# Altium PCB Плата-2.PcbDoc
Units mm, origin at the board's own origin, x right, y up, seen from the top; angles counter-clockwise.
Board outline 152.4 x 101.6 mm, 2 copper layers (Top Layer, Bottom Layer); 13 components, 14 nets, 124 pads, 0 vias.
Unrouted connection lines stored in the file: 2.
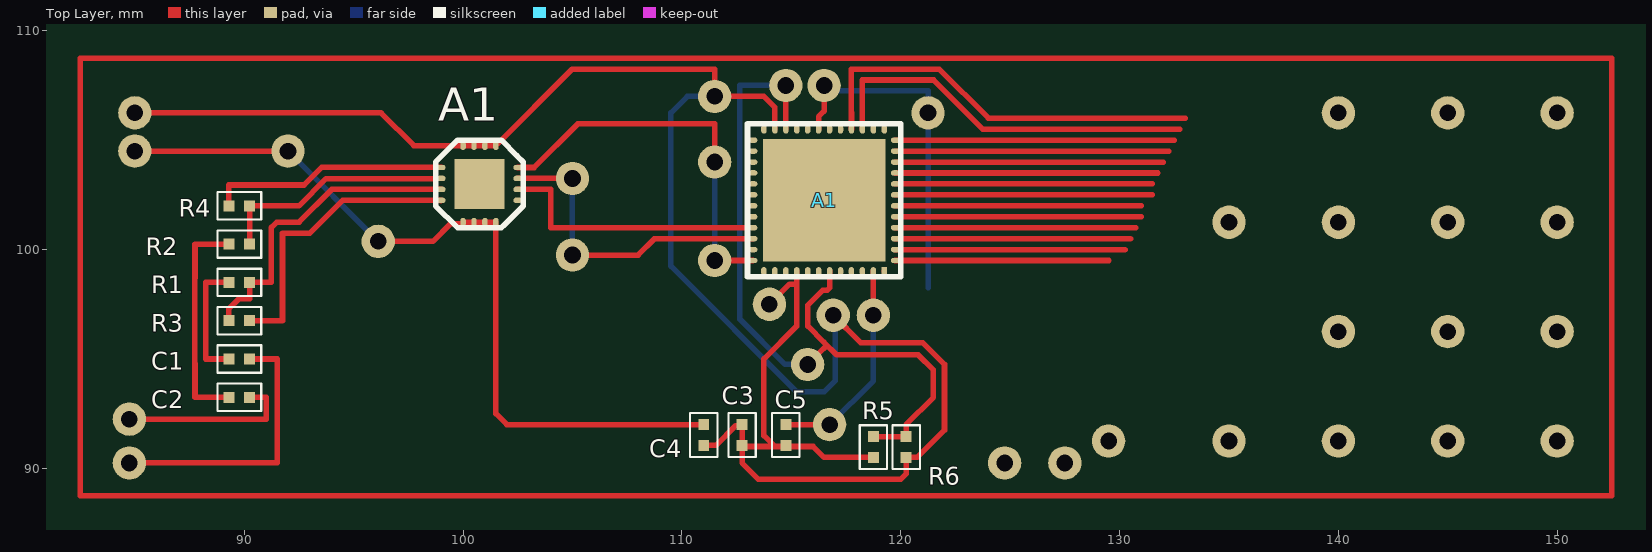
[diagram p0: Top Layer view]
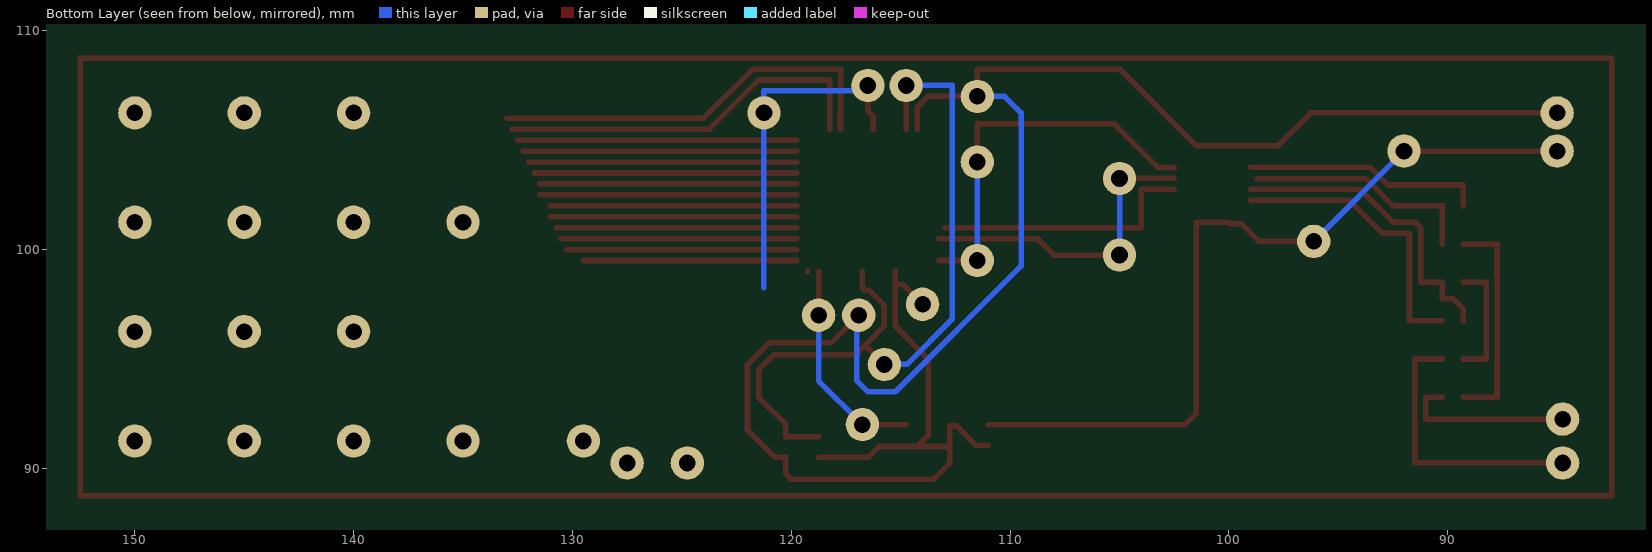
[diagram p1: Bottom Layer view, seen from below]

## Layer stack, top to bottom
Top Solder: solder mask 0.0102, Solder Resist, Dk 3.5
Top Layer: signal copper 0.0356
Dielectric 1: dielectric 0.32, FR-4, Dk 4.8
Bottom Layer: signal copper 0.0356
Bottom Solder: solder mask 0.0102, Solder Resist, Dk 3.5

## Board outline
25.4,25.4 177.8,25.4 177.8,127 25.4,127

## Design rules (kind name [scope] priority, off if disabled: settings)
Clearance [All] p1: gap=0.254 ignorepadtopadclearanceinfootprint=FALSE except(0: Arc-Hole Track-Hole SMDPad-Hole THPad-Hole Via-Hole Fill-Hole Poly-Hole Region-Hole Text-Hole)
PolygonConnect [All] p1: connectstyle=Relief reliefconductorwidth=0.254 reliefentries=4 polygonreliefangle="90 Angle" airgapwidth=0.254
RoomDefinition Схемотехника-2 [InComponentClass('Схемотехника-2')] p1: confinementstyle=ConfineIn formatcopy=TRUE lockcomponents=FALSE outline 68.234,43.623 127.924,43.623 127.924,53.275 68.234,53.275
RoutingVias [All] p1: holewidth=0.711 width=1.27 viastyle="Through Hole" minholewidth=0.711 minwidth=1.27 maxholewidth=0.711 maxwidth=1.27
ShortCircuit [All] p1: allowed=TRUE
SolderMaskExpansion [All] p1: expansion=0.102
Width [All] p1: maxlimit=0.254 minlimit=0.254 preferedwidth=0.254
29 further rules are at their usual default settings.

## Components (designator, comment, footprint, x,y, rotation, side; value= is the part's Value field where it differs from the comment)
A1 "ACP 14-byt" ads61b49 116.5,102.25 r180 top (schematic designator *)
A1 "ADA4932-1" ADA4932-2 100.75,103 r180 top
C1 "Cond" Capacitor 89.3,95 r0 top
C2 "Cond" Capacitor 89.3,93.25 r0 top
C3 "Cond" Capacitor 112.75,91.05 r90 top
C4 "Cond" Capacitor 111,92 r270 top
C5 "Cond" Capacitor 114.75,92 r270 top
R1 "Res" Resistor 88.7,97.8 r0 top
R2 "Res" Resistor 88.7,99.55 r0 top
R3 "Res" Resistor 88.7,96.05 r0 top
R4 "Res" Resistor 90.85,102.7 r180 top
R5 "Res" Resistor 119.45,89.9 r90 top
R6 "Res" Resistor 119.55,92.05 r270 top

## Footprints (in the part's own frame and the unit in brackets; to place one, negate y for a bottom-side part, rotate by r counter-clockwise, add the part's x,y. Pads: shape width x height; smd on the part's side, far side on the other; paste and mask are expansions set on the pad)
ADA4932-2 [mm]
  oval 0.4x0.25 smd: 1(1.75,0.75) 3(1.75,-0.25) 4(1.75,-0.75) 9(-1.75,-0.75) 10(-1.75,-0.25) 11(-1.75,0.25) 12(-1.75,0.75) 89(1.75,0.25)
  oval 0.25x0.4 smd: 5(0.75,-1.75) 6(0.25,-1.75) 7(-0.25,-1.75) 8(-0.75,-1.75) 13(-0.75,1.75) 14(-0.25,1.75) 15(0.25,1.75) 16(0.75,1.75)
  rect 2.3x2.3 smd: 25(0,0)
  silkscreen extent -2,-2 2,2.01
ads61b49 [mm]
  rect 0.25x0.4 smd: 1(-2.75,3.25)
  oval 0.25x0.4 smd: 2(-2.25,3.25) 3(-1.75,3.25) 4(-1.25,3.25) 5(-0.75,3.25) 6(-0.25,3.25) 7(0.25,3.25) 8(0.75,3.25) 9(1.25,3.25) 10(1.75,3.25) 11(2.25,3.25) 12(2.75,3.25) 25(2.75,-3.25) 26(2.25,-3.25) 27(1.75,-3.25) 28(1.25,-3.25) 29(0.75,-3.25) 30(0.25,-3.25) 31(-0.25,-3.25) 32(-0.75,-3.25) 33(-1.25,-3.25) 34(-1.75,-3.25) 35(-2.25,-3.25) 36(-2.75,-3.25)
  oval 0.4x0.25 smd: 13(3.25,2.75) 14(3.25,2.25) 15(3.25,1.75) 16(3.25,1.25) 17(3.25,0.75) 18(3.25,0.25) 19(3.25,-0.25) 20(3.25,-0.75) 21(3.25,-1.25) 22(3.25,-1.75) 23(3.25,-2.25) 24(3.25,-2.75) 37(-3.25,-2.75) 38(-3.25,-2.25) 39(-3.25,-1.75) 40(-3.25,-1.25) 41(-3.25,-0.75) 42(-3.25,-0.25) 43(-3.25,0.25) 44(-3.25,0.75) 45(-3.25,1.25) 46(-3.25,1.75) 47(-3.25,2.25) 48(-3.25,2.75)
  rect 5.6x5.6 smd: 49(0,0)
  silkscreen extent -3.5,-3.5 3.5,3.5
Capacitor [mm]
  rect 0.5x0.5 smd: 1(0,0) 2(0.95,0)
  silkscreen extent -0.53,-0.63 1.48,0.63
Resistor [mm]
  rect 0.5x0.5 smd: 1(0.6,0.7) 2(1.55,0.7)
  silkscreen extent 0.08,0.07 2.08,1.32

## Free pads (board coordinates)
  round 1.524 hole 0.762: 60(150,91.25) 61(150,106.25) 62(150,101.25) 63(150,96.25) 64(145,101.25) 65(145,106.25) 66(145,96.25) 67(145,91.25) 68(140,91.25) 69(140,96.25) 70(140,101.25) 71(140,106.25) 73(135,101.25) 75(135,91.25) 91(129.5,91.25) 96(124.75,90.25) 97(127.5,90.25) 105(105,103.25) 106(105,99.75) 110(111.5,107) 111(116.75,92) 112(118.75,97) 113(116.917,97) 118(111.5,99.5) 119(111.5,104) 120(114.75,107.5) 122(115.75,94.75) 125(92,104.5) 126(96.125,100.375) +5V(85,106.25) -5V(85,104.5) Gnd(114,97.5) Gnd(116.5,107.5) Gnd(121.25,106.25) "P3 In"(84.75,92.25) "P4 In"(84.75,90.25)

## Nets (pads, with @x,y where several pads share a name; then routed paths per layer and width w, separated by ;. In a path a pad name is that pad's centre, name@x,y a point inside that pad or via, vN(x,y) a via of type N, cw(c..) or ccw(c..) an arc to the next point about the centre after c; other vN are vias at no path point)
GND: C3.2 C4.2 C5.2 pad.Gnd@114,97.5 R5.1 | length 19.1
  Top Layer w0.254: C4.2 111.55,91.05 112.45,91.95 112.75,91.95 112.75,91.05 112.8,91 114.25,91 ; pad.Gnd@114,97.5 114.919,98.419 115.25,98.419 115.25,96.5 113.75,95 113.75,91.5 114.25,91 ; R5.1 116.5,90.5 116,91 114.25,91
NetA1_1: A1.1@99,102.25 R3.2 | length 13.4
  Top Layer w0.254: R3.2 91.75,96.75 91.75,100.75 93,100.75 94.494,102.244 99,102.244 A1.1@98.99,102.234
NetA1_2: A1.2 C5.1 pad.111 pad.112 | length 10.5
  Top Layer w0.254: C5.1 pad.111 ; pad.112@118.55,97.6 pad.112 A1.2
  Bottom Layer w0.254: pad.111 118.75,94 pad.112
NetA1_3: A1.3@99,103.25 R2.2 R4.1 | length 10.7
  Top Layer w0.254: R2.2 R4.1 91.032,102 91.04,102.008 92.492,102.008 92.5,102 93.742,103.242 98.701,103.242
NetA1_4: A1.4@99,103.75 R4.2 | length 11
  Top Layer w0.254: R4.2 89.3,102.95 92.732,102.95 93.536,103.754 98.709,103.754 98.709,103.756 A1.4@99,103.756
NetA1_5: A1.5@100,104.75 A1.6@100.5,104.75 A1.7@101,104.75 A1.8@101.5,104.75 A1.26 C3.1 pad.110 pad.113 R6.2 | length 61.3
  Top Layer w0.254: A1.5@100,104.75 100.5,104.75 101,104.75 101.5,104.75 104.992,108.242 111.5,108.242 pad.110 113.75,107 114.25,106.5 A1.26 ; C3.1@112.75,91 112.75,90.25 113.5,89.5 120,89.5 120.25,89.75 R6.2 120.75,90.5 122,91.75 122,94.75 121,95.75 118.167,95.75 pad.113
  Bottom Layer w0.254: pad.110 110.25,107 109.5,106.25 109.5,99.25 115.25,93.5 116.5,93.5 117,94 117,96.917 pad.113
NetA1_6: A1.6@116.75,99 A1.27 pad.120 pad.122 R5.2 R6.1 | length 34.5
  Top Layer w0.254: A1.27 pad.120 ; pad.122 116.5,95.5 116.504,95.504 ; A1.6@116.75,99 116.75,98.25 116.643,98.143 116.443,98.143 115.758,97.458 115.758,96.5 116.504,95.754 117.065,95.193 120.799,95.193 121.492,94.5 121.492,93.242 120.25,92 R6.1 R5.2
  Bottom Layer w0.254: pad.120 112.643,107.5 112.643,96.825 114.718,94.75 pad.122
NetA1_9: A1.9@102.5,103.75 A1.13@113.25,99.5 | length 13.3
  Top Layer w0.254: A1.9@102.5,103.75 103.25,103.75 105.25,105.75 111.5,105.75 111.5,104 ; 111.5,99.5 A1.13@113.25,99.5
NetA1_10: A1.10@102.5,103.25 A1.15@113.25,100.5 | length 11.1
  Top Layer w0.254: A1.10@102.5,103.25 105,103.25 ; 105,99.75 108,99.75 108.75,100.5 A1.15@113.25,100.5
NetA1_11: A1.11@102.5,102.75 A1.16@113.25,101 | length 12.2
  Top Layer w0.254: A1.11@102.5,102.75 104,102.75 104,101 112.959,101
NetA1_13: A1.13@101.5,101.25 A1.14@101,101.25 A1.15@100.5,101.25 A1.16@100,101.25 C4.1 | length 20
  Top Layer w0.254: A1.16@100,101.25 100.5,101.25 101,101.25 101.5,101.25 101.5,92.5 102,92 C4.1
NetA1_89: A1.89 R1.2 R3.1 | length 14.4
  Top Layer w0.254: R3.1 89.3,97.3 89.75,97.75 90.25,97.75 R1.2 91.242,98.5 91.242,101.008 91.492,101.258 92.508,101.258 94,102.75 A1.89
NetC1_1: C1.1 R1.1 | length 5.6
  Top Layer w0.254: C1.1 88.25,95 88.25,98.5 R1.1
NetC2_1: C2.1 R2.1 | length 10.1
  Top Layer w0.254: C2.1 87.75,93.25 87.75,94.782 87.742,94.79 87.742,98.71 87.75,98.718 87.75,100.25 R2.1
pads on no net: A1.1@119.25,99 A1.3@118.25,99 A1.4@117.75,99 A1.5@117.25,99 A1.7@116.25,99 A1.8@115.75,99 A1.9@115.25,99 A1.10@114.75,99 A1.11@114.25,99 A1.12 A1.14@113.25,100 A1.17 A1.18 A1.19 A1.20 A1.21 A1.22 A1.23 A1.24 A1.25 A1.28 A1.29 A1.30 A1.31 A1.32 A1.33 A1.34 A1.35 A1.36 A1.37 A1.38 A1.39 A1.40 A1.41 A1.42 A1.43 A1.44 A1.45 A1.46 A1.47 A1.48 A1.49 C1.2 C2.2
copper on no net: | length 478.2
  Top Layer w0.254: 84.75,90.25 91.5,90.25 91.5,92.032 91.508,92.04 91.508,93.468 91.5,93.476 91.5,95 90.25,95 ; 84.75,92.25 91,92.25 91,93.25 90.25,93.25 ; 85,104.5 92,104.5 90,104.5 ; 85,106.25 96.25,106.25 97.75,104.75 100,104.75 ; 96.125,100.375 98.625,100.375 99.437,101.187 99.938,101.187 100,101.25 ; 105,99.75 108,99.75 108.742,100.492 ; 115.25,98.419 115.25,99 ; 116.25,105.5 116.25,106.081 116.5,106.331 116.5,107.5 ; 117.75,105.5 117.75,106.25 117.75,108.25 121.758,108.25 124.004,106.004 132.996,106.004 ; 118.25,105.5 118.25,107.75 121.5,107.75 123.742,105.508 132.742,105.508 ; 119.75,99.5 129.5,99.5 ; 119.75,100 130.25,100 ; 119.75,100.5 130.5,100.5 ; 119.75,101 130.75,101 ; 119.75,101.5 131,101.5 ; 119.75,102 131,102 ; 119.75,102.5 131.5,102.5 ; 119.75,103 131.5,103 ; 119.75,103.5 131.75,103.5 ; 119.75,104 132,104 ; 119.75,104.5 132.25,104.5 ; 119.75,105 132.5,105 ; 82.5,88.75 152.5,88.75 152.5,108.75 82.5,108.75 ; 82.5,88.75 82.5,108.75 ; 82.5,88.75 82.5,108.75 ; 82.5,88.75 82.5,108.75
  Bottom Layer w0.254: 92,104.5 96.125,100.375 ; 105,99.75 105,103.25 ; 111.5,99.5 111.5,104 ; 116.5,107.5 116.833,107.167 117,107.25 119.5,107.25 120.5,107.25 121.25,107.25 121.25,106.25 121.25,98.25